# EAGLE board axios_combined (EAGLE 9.5.1), part 1 of 2
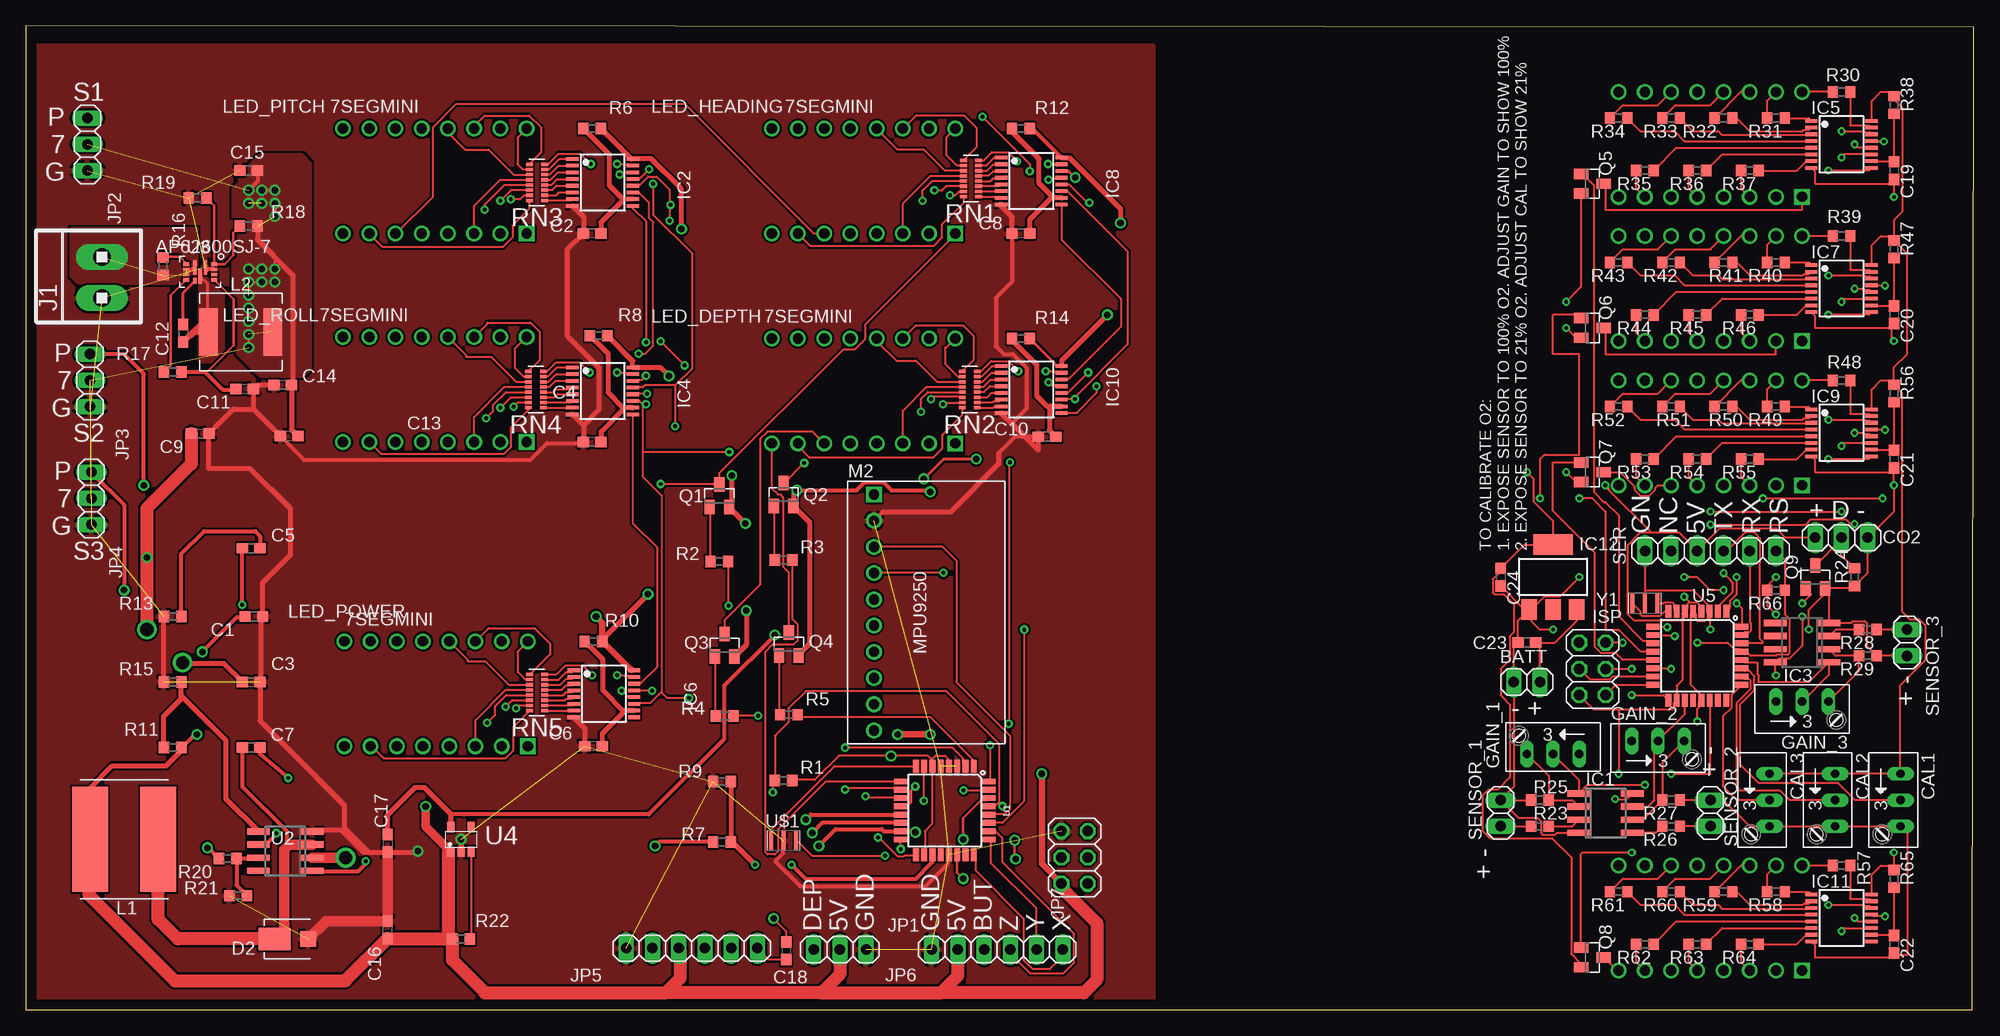
[diagram p0: board, top side]
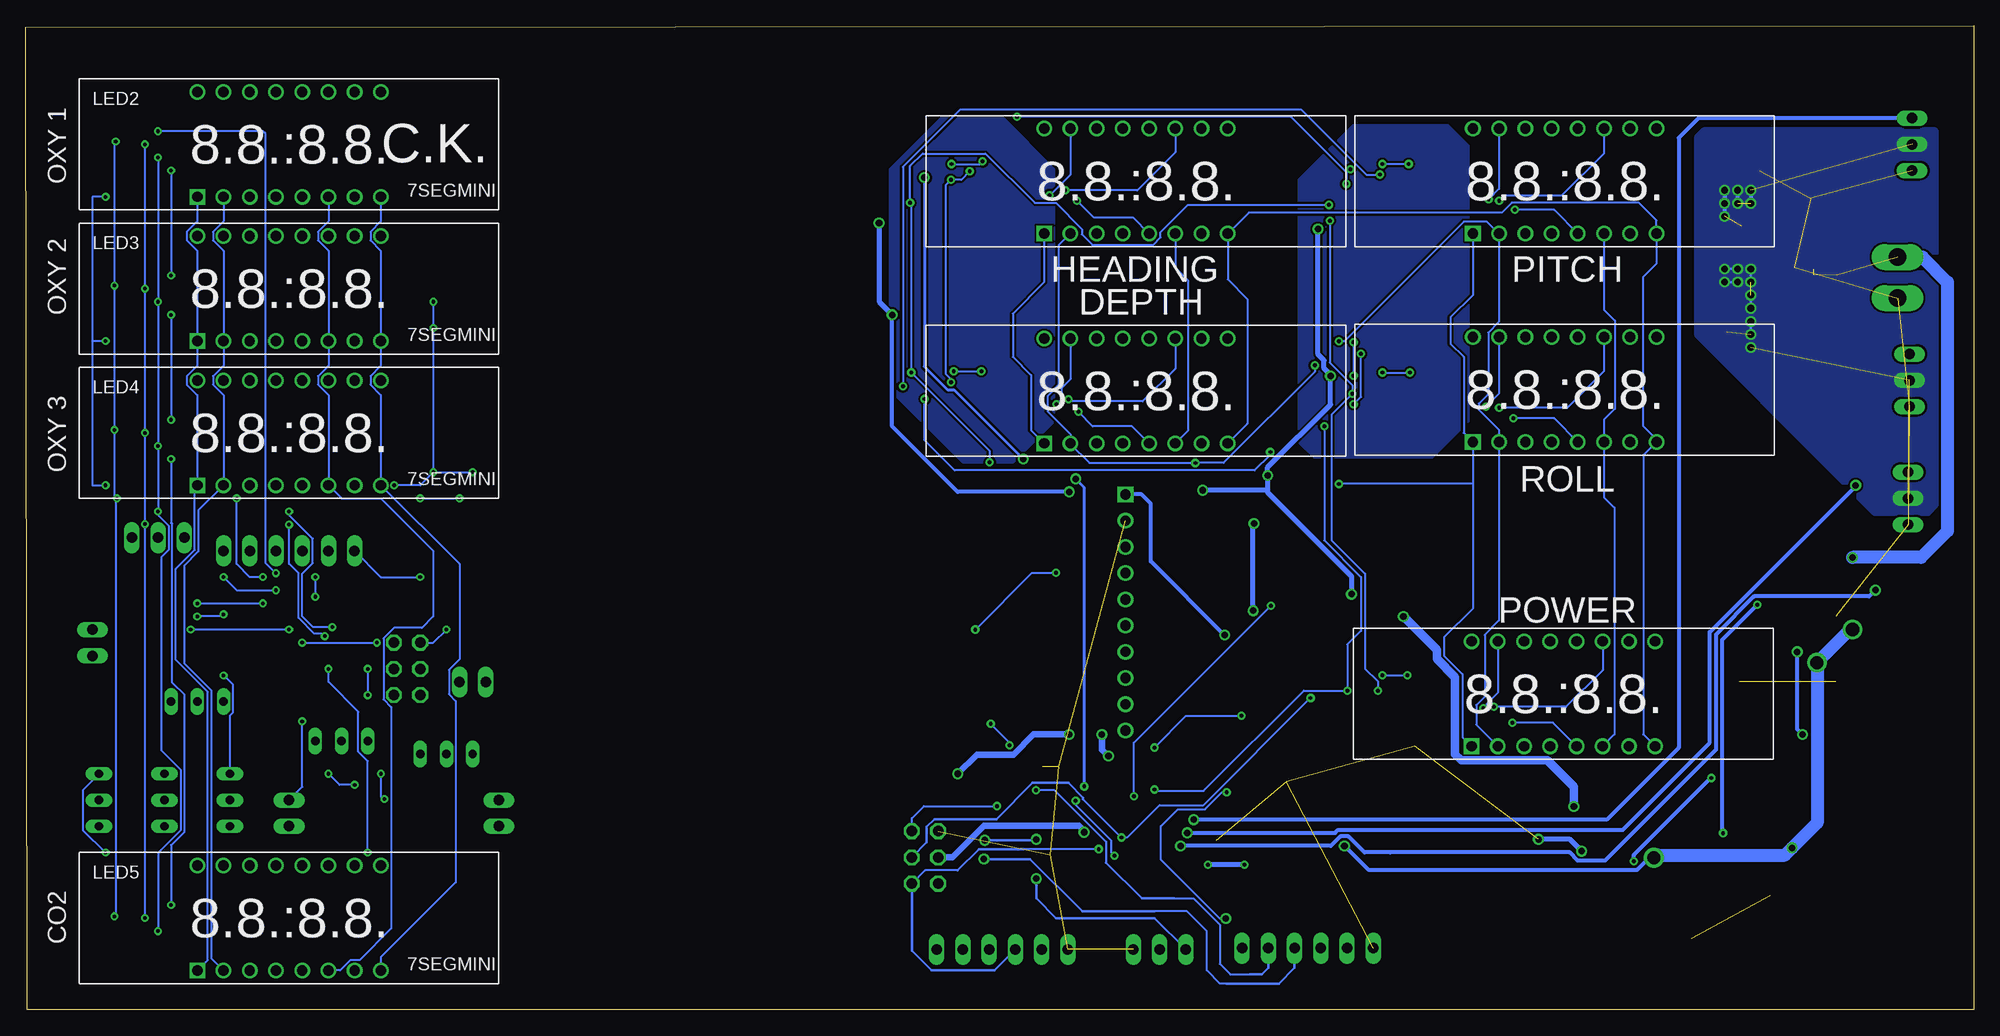
[diagram p1: board, bottom side, seen from below]

Size 188.7 x 95.3 mm. Coordinates in mm from the lower left corner, seen from the top.
Outline: 0,0 188.57,0 188.7,95.17 0,95.3 0,0
Copper layers (1*16): Top 0.035mm / dielectric 1.5mm / Bottom 0.035mm
Design rules "default": minimum track width 6mil, minimum drill 0.35mm, track to track 6mil, track to pad 6mil, pad to pad 6mil, via to via 6mil, smd to smd 6mil, copper to edge 40mil, drill to drill 6mil, minimum pad ring 10mil, minimum via ring 8mil, stop-mask expansion 4mil, vias tented up to drill 0mil, thermal gap 10mil
Net classes: 2 Low Power: width 0.254 mm, drill 0.635 mm, clearance 0.203 mm; 3 Analog: width 0.254 mm, drill 0.381 mm, clearance 0.203 mm; 4 Digital: width 0.203 mm, drill 0.381 mm, clearance 0.203 mm; 5 Medium Power: width 0.381 mm, drill 0.635 mm, clearance 0.203 mm

## Footprints (pad centres in the part's own frame; a part is rotated, then mirrored left to right if it is on the bottom)
1X02 = drill 1.016 long: 1 -1.27,0; 2 1.27,0
C0603 = smd 1.1 x 1: 1 -0.85,0; 2 0.85,0
RJ9W = drill 0.813 long: A 2.54,0.635; E -2.54,0.635; S 0,0.635
1X03 = drill 1.016 long: 1 -2.54,0; 2 0,0; 3 2.54,0
SMPA = smd 1.524 x 1.524: A 1.702,0 | smd 3.099 x 2.21: C -1.549,0
SO8 = smd 0.6 x 2.2: 1 -1.905,-2.6; 2 -0.635,-2.6; 3 0.635,-2.6; 4 1.905,-2.6; 5 1.905,2.6; 6 0.635,2.6; 7 -0.635,2.6; 8 -1.905,2.6
TSSOP16 = smd 0.35 x 1.2: 1 -2.275,-2.925; 2 -1.625,-2.925; 3 -0.975,-2.925; 4 -0.325,-2.925; 5 0.325,-2.925; 6 0.975,-2.925; 7 1.625,-2.925; 8 2.275,-2.925; 9 2.275,2.925; 10 1.625,2.925; 11 0.975,2.925; 12 0.325,2.925; 13 -0.325,2.925; 14 -0.975,2.925; 15 -1.625,2.925; 16 -2.275,2.925
SOT223 = smd 1.5 x 2: 1 -2.3,-3.15; 2 0,-3.15; 3 2.3,-3.15 | smd 3.8 x 2: 4 0,3.15
2X03 = drill 1.016 octagon: 1 -2.54,-1.27; 2 -2.54,1.27; 3 0,-1.27; 4 0,1.27; 5 2.54,-1.27; 6 2.54,1.27
1X2MTA = drill 1.676 long: 1 1.981,0; 2 -1.981,0
1X06 = drill 1.016 long: 1 -6.35,0; 2 -3.81,0; 3 -1.27,0; 4 1.27,0; 5 3.81,0; 6 6.35,0
SRN1060-330M = smd 3.5 x 10.2: P$1 -3.3,0; P$2 3.3,0
ECS-MPIL0630-R82MC = smd 1.8 x 4.6: P$1 -3.13,0; P$2 3.1,0
7SEGMINI = drill 1 square: 1 -8.89,-5.08 | drill 1: 2 -6.35,-5.08; 3 -3.81,-5.08; 4 -1.27,-5.08; 5 1.27,-5.08; 6 3.81,-5.08; 7 6.35,-5.08; 8 8.89,-5.08; 9 8.89,5.08; 10 6.35,5.08; 11 3.81,5.08; 12 1.27,5.08; 13 -1.27,5.08; 14 -3.81,5.08; 15 -6.35,5.08; 16 -8.89,5.08
MPU9250 = drill 1: AD0 0,-3.81; ECL 0,-1.27; EDA 0,1.27; FSYNC 0,-11.43; GND 0,8.89; INT 0,-6.35; NCS 0,-8.89; SCL 0,6.35; SDA 0,3.81 | drill 1 square: VCC 0,11.43
SOT23 = smd 1 x 1.4: 1 -0.95,-1.1; 2 0.95,-1.1; 3 0,1.1
R0603 = smd 1 x 1.1: 1 -0.85,0; 2 0.85,0
CAY16-681J8LF = smd 0.35 x 0.65: 1 -1.75,-0.725; 2 -1.25,-0.725; 3 -0.75,-0.725; 4 -0.25,-0.725; 5 0.25,-0.725; 6 0.75,-0.725; 7 1.25,-0.725; 8 1.75,-0.725; 9 1.75,0.725; 10 1.25,0.725; 11 0.75,0.725; 12 0.25,0.725; 13 -0.25,0.725; 14 -0.75,0.725; 15 -1.25,0.725; 16 -1.75,0.725
TQFP32-08 = smd 1.27 x 0.559: 1 -4.293,2.8; 2 -4.293,2; 3 -4.293,1.2; 4 -4.293,0.4; 5 -4.293,-0.4; 6 -4.293,-1.2; 7 -4.293,-2; 8 -4.293,-2.8; 17 4.293,-2.8; 18 4.293,-2; 19 4.293,-1.2; 20 4.293,-0.4; 21 4.293,0.4; 22 4.293,1.2; 23 4.293,2; 24 4.293,2.8 | smd 0.559 x 1.27: 9 -2.8,-4.293; 10 -2,-4.293; 11 -1.2,-4.293; 12 -0.4,-4.293; 13 0.4,-4.293; 14 1.2,-4.293; 15 2,-4.293; 16 2.8,-4.293; 25 2.8,4.293; 26 2,4.293; 27 1.2,4.293; 28 0.4,4.293; 29 -0.4,4.293; 30 -1.2,4.293; 31 -2,4.293; 32 -2.8,4.293
V-QFN2030-12 = smd 0.6 x 0.35: BST 0.85,-0.5 | smd 0.35 x 0.6: EN -0.75,-1.35; FB -0.75,1.35; FSEL 0.25,-1.35; GND -0.25,1.35; MODE -0.25,-1.35; PG 0.75,-1.35; SS/TR 0.25,1.35; VCC 0.75,1.35 | smd 1.4 x 0.35: PGND -0.45,0.5; SW 0.45,0; VIN -0.45,-0.5
TSOP-5 = smd 0.7 x 1: 1 -0.99,-1.2; 2 0,-1.2; 3 0.99,-1.2; 4 0.99,1.2; 5 -0.99,1.2
CSTCR6M = smd 0.4 x 1.9: 1 -1.2,0; 2 0,0; 3 1.2,0

## Placement (x,y rotation side)
BATT  BATT  [1X02]  145.41,31.75 0 top
C1  100u  [C0603]  22.1,38.1 0 top
C2  0.1u  [C0603]  54.86,75.18 180 top
C3  47u  [C0603]  21.84,31.75 0 top
C4  0.1u  [C0603]  54.86,54.99 180 top
C5  1.5n  [C0603]  21.84,44.7 0 top
C6  0.1u  [C0603]  54.99,25.53 180 top
C7  10n  [C0603]  21.84,25.4 180 top
C8  0.1u  [C0603]  96.39,75.18 180 top
C9  22u  [C0603]  16.89,55.82 0 top
C10  0.1u  [C0603]  98.93,55.5 180 top
C11  1u  [C0603]  21.21,60.13 0 top
C12  100n  [C0603]  15.24,65.53 270 top
C13  22u  [C0603]  25.53,55.56 180 top
C14  22u  [C0603]  24.89,60.51 180 top
C15  22u  [C0603]  21.59,81.28 180 top
C16  1.5u  [C0603]  35.05,7.75 90 top
C17  1.5u  [C0603]  35.05,16.13 270 top
C18  100n  [C0603]  73.66,5.71 270 top
C19  10n  [C0603]  180.97,81.28 270 top
C20  10n  [C0603]  180.97,67.31 270 top
C21  10n  [C0603]  180.97,53.34 270 top
C22  10n  [C0603]  180.97,6.35 270 top
C23  1u  [C0603]  145.41,35.56 180 top
C24  1u  [C0603]  142.88,41.91 270 top
CAL1  10k  [RJ9W]  180.97,20.32 270 top
CAL2  10k  [RJ9W]  174.62,20.32 270 top
CAL3  10k  [RJ9W]  168.27,20.32 270 top
CO2  CO2  [1X03]  175.89,45.72 180 top
D2  V4PAN50-M3  [SMPA]  25.65,6.86 0 top
GAIN_1  10k  [RJ9W]  147.95,25.4 180 top
GAIN_2  10k  [RJ9W]  158.11,25.4 0 top
GAIN_3  10k  [RJ9W]  172.08,29.21 0 top
IC1  AD712R  [SO8]  153.03,19.05 270 top
IC2  SN74HCS595QPWRQ1  [TSSOP16]  55.88,80.14 270 top
IC3  AD712R  [SO8]  172.08,35.56 90 top
IC4  SN74HCS595QPWRQ1  [TSSOP16]  55.88,59.94 270 top
IC5  SN74HCS595QPWRQ1  [TSSOP16]  175.89,83.82 270 top
IC6  SN74HCS595QPWRQ1  [TSSOP16]  56.01,30.61 270 top
IC7  SN74HCS595QPWRQ1  [TSSOP16]  175.89,69.85 270 top
IC8  SN74HCS595QPWRQ1  [TSSOP16]  97.41,80.26 270 top
IC9  SN74HCS595QPWRQ1  [TSSOP16]  175.89,55.88 270 top
IC10  SN74HCS595QPWRQ1  [TSSOP16]  97.41,60.07 270 top
IC11  SN74HCS595QPWRQ1  [TSSOP16]  175.89,8.89 270 top
IC12  5V  [SOT223]  147.95,41.91 0 top
ISP  ISP  [2X03]  151.76,33.02 90 top
J1  [1X2MTA]  7.37,70.92 90 top
JP1  Depth Sensor  [1X03]  78.87,5.84 180 top
JP2  Servo1  [1X03]  5.97,83.82 90 top
JP3  Servo2  [1X03]  6.22,60.96 90 top
JP4  Servo3  [1X03]  6.35,49.53 90 top
JP5  SER_CONNECT  [1X06]  64.52,5.97 0 top
JP6  CTRL_CONNECT  [1X06]  94.11,5.84 180 top
JP7  ISP  [2X03]  101.6,14.76 90 top
L1  33u  [SRN1060-330M]  9.52,16.51 180 top
L2  0.82u  [ECS-MPIL0630-R82MC]  20.83,65.66 0 top
LED2  7SEGMINI  [7SEGMINI]  163.19,83.82 0 bottom
LED3  7SEGMINI  [7SEGMINI]  163.19,69.85 0 bottom
LED4  7SEGMINI  [7SEGMINI]  163.19,55.88 0 bottom
LED5  7SEGMINI  [7SEGMINI]  163.19,8.89 0 bottom
LED_DEPTH  7SEGMINI  [7SEGMINI]  81.15,59.94 0 bottom
LED_HEADING  7SEGMINI  [7SEGMINI]  81.15,80.26 0 bottom
LED_PITCH  7SEGMINI  [7SEGMINI]  39.62,80.26 0 bottom
LED_POWER  7SEGMINI  [7SEGMINI]  39.75,30.61 0 bottom
LED_ROLL  7SEGMINI  [7SEGMINI]  39.62,60.07 0 bottom
M2  MPU9250  [MPU9250]  82.17,38.48 0 top
Q1  XP231P0201TR  [SOT23]  67.18,49.78 0 top
Q2  XP231P0201TR  [SOT23]  73.41,49.91 0 top
Q3  XP231P0201TR  [SOT23]  67.69,35.31 0 top
Q4  XP231P0201TR  [SOT23]  73.91,35.43 0 top
Q5  XP231P0201TR  [SOT23]  151.76,80.01 270 top
Q6  XP231P0201TR  [SOT23]  151.76,66.04 270 top
Q7  XP231P0201TR  [SOT23]  151.76,52.07 270 top
Q8  XP231P0201TR  [SOT23]  151.76,5.08 270 top
Q9  SST5485  [SOT23]  173.35,41.91 0 top
R1  10k  [R0603]  73.41,22.23 180 top
R2  1k  [R0603]  67.18,43.43 180 top
R3  1k  [R0603]  73.41,43.56 180 top
R4  1k  [R0603]  67.69,28.45 180 top
R5  1k  [R0603]  73.91,28.57 180 top
R6  10k  [R0603]  54.86,85.34 180 top
R7  15k  [R0603]  67.44,16.26 0 top
R8  10k  [R0603]  55.5,65.28 180 top
R9  10k  [R0603]  67.44,22.1 180 top
R10  10k  [R0603]  54.99,35.69 180 top
R11  52k  [R0603]  14.22,25.4 0 top
R12  10k  [R0603]  96.39,85.34 180 top
R13  12k  [R0603]  14.22,38.1 0 top
R14  10k  [R0603]  96.39,65.02 180 top
R15  10k  [R0603]  14.22,31.75 0 top
R16  100k  [R0603]  13.27,72.01 270 top
R17  100k  [R0603]  14.22,61.78 0 top
R18  100k  [R0603]  21.59,75.9 0 top
R19  100k  [R0603]  16.63,78.61 0 top
R20  15k  [R0603]  19.56,14.65 0 top
R21  10k  [R0603]  20.57,11.05 180 top
R22  100k  [R0603]  42.16,6.86 180 top
R23  100k  [R0603]  146.69,17.78 0 top
R24  10k  [R0603]  177.16,41.91 90 top
R25  0.7k  [R0603]  146.69,20.32 0 top
R26  100k  [R0603]  159.38,17.78 180 top
R27  0.7k  [R0603]  159.38,20.32 180 top
R28  100k  [R0603]  178.44,36.83 180 top
R29  0.7k  [R0603]  178.44,34.29 180 top
R30  [R0603]  175.89,88.9 180 top
R31  [R0603]  169.54,86.36 180 top
R32  [R0603]  164.46,86.36 180 top
R33  [R0603]  159.38,86.36 180 top
R34  [R0603]  154.3,86.36 180 top
R35  [R0603]  156.84,81.28 180 top
R36  [R0603]  161.92,81.28 180 top
R37  [R0603]  167,81.28 180 top
R38  100k  [R0603]  180.97,87.63 90 top
R39  [R0603]  175.89,74.93 180 top
R40  [R0603]  169.54,72.39 180 top
R41  [R0603]  164.46,72.39 180 top
R42  [R0603]  159.38,72.39 180 top
R43  [R0603]  154.3,72.39 180 top
R44  [R0603]  156.84,67.31 180 top
R45  [R0603]  161.92,67.31 180 top
R46  [R0603]  167,67.31 180 top
R47  100k  [R0603]  180.97,73.66 90 top
R48  [R0603]  175.89,60.96 180 top
R49  [R0603]  169.54,58.42 180 top
R50  [R0603]  164.46,58.42 180 top
R51  [R0603]  159.38,58.42 180 top
R52  [R0603]  154.3,58.42 180 top
R53  [R0603]  156.84,53.34 180 top
R54  [R0603]  161.92,53.34 180 top
R55  [R0603]  167,53.34 180 top
R56  100k  [R0603]  180.97,59.69 90 top
R57  [R0603]  175.89,13.97 180 top
R58  [R0603]  169.54,11.43 180 top
R59  [R0603]  164.46,11.43 180 top
R60  [R0603]  159.38,11.43 180 top
R61  [R0603]  154.3,11.43 180 top
R62  [R0603]  156.84,6.35 180 top
R63  [R0603]  161.92,6.35 180 top
R64  [R0603]  167,6.35 180 top
R65  100k  [R0603]  180.97,12.7 90 top
R66  10k  [R0603]  169.54,40.64 180 top
RN1  CAY16-681J8LF  [CAY16-681J8LF]  91.57,80.52 90 top
RN2  CAY16-681J8LF  [CAY16-681J8LF]  91.44,60.07 90 top
RN3  CAY16-681J8LF  [CAY16-681J8LF]  49.53,80.14 90 top
RN4  CAY16-681J8LF  [CAY16-681J8LF]  49.4,60.07 90 top
RN5  CAY16-681J8LF  [CAY16-681J8LF]  49.53,30.73 90 top
SENSOR_1  [1X02]  142.88,19.05 90 top
SENSOR_2  [1X02]  163.19,19.05 90 top
SENSOR_3  [1X02]  182.24,35.56 270 top
SER  SER  [1X06]  163.19,44.45 0 top
U1  ATMEGA328P_TQFP  [TQFP32-08]  89.03,19.3 270 top
U2  ACT4065ASH-T  [SO8]  25.15,15.37 90 top
U3  AP62600SJ-7  [V-QFN2030-12]  16.89,71.46 270 top
U4  NCP164CSN330T1G  [TSOP-5]  42.16,16.51 0 top
U5  ATMEGA328P_TQFP  [TQFP32-08]  161.92,34.29 270 top
U$1  CSTNE16M0V530000R0  [CSTCR6M]  73.41,16.38 0 top
Y1  16MHz  [CSTCR6M]  156.84,39.37 180 top

## Library data of the parts
BATT CO2 ISP JP1-JP7 SENSOR_1-SENSOR_3 SER = pinhead
C1-C24 = rcl; SPICEPREFIX: C
CAL1-CAL3 GAIN_1-GAIN_3 = pot
D2 IC2 IC4-IC11 L1 L2 LED2-LED5 LED_DEPTH LED_HEADING LED_PITCH LED_POWER LED_ROLL Q1-Q9 RN1-RN5 U2-U4 U$1 Y1 = axios_components
IC1 IC3 = analog-devices; MF: ALTERA CORPORATION; MPN: AD712KRZ; OC_FARNELL: 1263975; OC_NEWARK: 59K4556
IC12 = v-reg
J1 = con-amp
M2 = diy-modules
R1-R66 = rcl; SPICEPREFIX: R
U1 U5 = axios_components; PROD_ID: IC-09069

## Nets
+3V3 [Low Power]: C17.1 M2.VCC U4.5
+5V [Low Power]: C1.1 C16.1 IC2.16 IC4.16 IC6.16 IC8.16 IC10.16 JP1.2 JP5.3 JP6.5 JP7.2 L1.P$2 Q1.2 Q2.2 Q3.2 Q4.2 R1.1 R6.1 R8.1 R10.1 R11.2 R12.1 R14.1 R22.2 U1.4 U1.6 U1.18 U4.1
+7V [Low Power]: C13.1 C14.1 C15.1 JP2.2 JP3.2 JP4.2 L2.P$2 R18.2
+12V [Low Power]: C3.1 C9.1 J1.1 R7.1 R16.2 R20.1 U2.2 U3.FSEL U3.MODE U3.VIN
BATT: BATT.2 C23.1 IC12.3
BATT_LEVEL [Digital]: R7.2 R9.1 U1.19
BUTTON: JP6.4 JP7.1 U1.16
CAL1: CAL1.S U5.27
CAL2: CAL2.S U5.26
CAL3: CAL3.S U5.25
CARRY1: IC5.9 IC7.14
CARRY2: IC7.9 IC9.14
CARRY3: IC9.9 IC11.14
CO2: Q9.1 U5.32
CO2_PWM: CO2.2 Q9.3 R24.2
COM_D1: LED2.1 LED3.1 LED4.1 LED5.1 Q5.3
COM_D2: LED2.2 LED3.2 LED4.2 LED5.2 Q6.3
COM_D3: LED2.6 LED3.6 LED4.6 LED5.6 Q7.3
COM_D4: LED2.8 LED3.8 LED4.8 LED5.8 Q8.3
DEPTH [Analog]: JP1.3 U1.22
DIG1: Q5.1 U5.11
DIG2: Q6.1 U5.12
DIG3: Q7.1 U5.13
DIG4: Q8.1 U5.14
DIGIT_1 [Digital]: R2.1 U1.11
DIGIT_2 [Digital]: R3.1 U1.9
DIGIT_3 [Digital]: R4.1 U1.2
DIGIT_4 [Digital]: R5.1 U1.1
DISP_CLK: IC5.11 IC7.11 IC9.11 IC11.11 U5.9
DISP_DATA [Digital]: IC8.14 U1.12
DISP_DATA1: IC5.14 U5.2
EN7V: R16.1 U3.EN
GND [Medium Power]: C1.2 C2.2 C3.2 C4.2 C6.2 C8.2 C9.2 C10.2 C11.2 C13.2 C14.2 C15.2 C16.2 C17.2 D2.A IC2.8 IC4.8 IC6.8 IC8.8 IC10.8 J1.2 JP1.1 JP2.1 JP3.1 JP4.1 JP5.1 JP6.6 JP7.6 M2.GND R9.2 R13.1 R15.1 R19.1 R21.2 U1.3 U1.5 U1.21 U2.4 U3.GND U3.PGND U4.2 U$1.2
GND1: R17.1 U3.PG
GND2: BATT.1 C19.2 C20.2 C21.2 C22.2 C23.2 C24.2 CAL1.A CAL2.A CAL3.A CO2.1 IC1.4 IC3.4 IC5.8 IC7.8 IC9.8 IC11.8 IC12.1 ISP.6 Q9.2 R24.1 R25.1 R27.1 R29.1 SENSOR_1.2 SENSOR_2.2 SENSOR_3.2 SER.1 U5.3 U5.5 U5.21 Y1.2
MISO: ISP.1 U5.16
MOSI: ISP.4 U5.15
N$1 [Digital]: C18.2 JP5.6
N$2: IC1.3 R23.2
N$3: GAIN_1.A IC1.2 R25.2
N$4: GAIN_3.A IC3.2 R29.2
N$5: IC8.9 IC10.14
N$6: IC5.15 R30.1
N$7: U1.8 U$1.1
N$8: IC1.5 R26.2
N$9: GAIN_2.A IC1.6 R27.2
N$10: IC5.1 R31.1
N$11: IC3.3 R28.2
N$12: U1.7 U$1.3
N$13: IC5.4 R34.1
N$14: IC5.5 R35.1
N$15: IC5.6 R36.1
N$16: IC5.7 R37.1
N$17: C7.1 U2.1
N$18: LED2.13 R33.2
N$19: LED2.5 R36.2
N$20: LED2.3 R37.2
N$21: Q1.1 R2.2
N$22: IC7.15 R39.1
N$23: Q2.1 R3.2
N$24: Q3.1 R4.2
N$25: Q4.1 R5.2
N$26: IC7.1 R40.1
N$27: C7.2 D2.C L1.P$1 U2.3
N$28: IC7.2 R41.1
N$29: R11.1 R15.2 U2.5
N$30: R22.1 U4.3
N$31: C5.2 R13.2
N$32: IC5.2 R32.1
N$33: IC5.3 R33.1
N$34: R20.2 R21.1 U2.7
N$35: C5.1 U2.6
N$36: C11.1 R17.2 U3.VCC
N$37: C12.2 L2.P$1 U3.SW
N$38: C19.1 IC5.10 R38.1
N$39: LED2.16 R30.2
N$40: LED2.15 R31.2
N$41: LED2.14 R32.2
N$42: R18.1 R19.2 U3.FB
N$43: LED2.11 R34.2
N$44: LED2.7 R35.2
N$45: LED_PITCH.14 RN3.9
N$46: LED_PITCH.16 RN3.10
N$47: LED_PITCH.13 RN3.11
N$48: LED_PITCH.3 RN3.12
N$49: LED_PITCH.5 RN3.13
N$50: LED_PITCH.11 RN3.14
N$51: LED_PITCH.15 RN3.15
N$52: LED_PITCH.7 RN3.16
N$53: IC2.15 RN3.8
N$54: IC2.1 RN3.7
N$55: IC2.2 RN3.6
N$56: IC2.3 RN3.5
N$57: IC2.4 RN3.4
N$58: IC2.5 RN3.3
N$59: IC2.6 RN3.2
N$60: IC2.7 RN3.1
N$61: C2.1 IC2.10 R6.2
N$62: C12.1 U3.BST
N$63: IC7.3 R42.1
N$64: IC7.4 R43.1
N$65: IC2.14 IC10.9
N$66: IC7.5 R44.1
N$67: IC7.6 R45.1
N$68: IC7.7 R46.1
N$69: C20.1 IC7.10 R47.1
N$70: LED3.16 R39.2
N$71: LED3.15 R40.2
N$72: LED3.14 R41.2
N$73: LED3.13 R42.2
N$74: LED3.11 R43.2
N$75: LED3.7 R44.2
N$76: LED3.5 R45.2
N$77: LED3.3 R46.2
N$78: IC9.15 R48.1
N$79: IC9.1 R49.1
N$80: IC9.2 R50.1
N$81: IC9.3 R51.1
N$82: IC9.4 R52.1
N$83: IC9.5 R53.1
N$84: IC9.6 R54.1
N$85: IC9.7 R55.1
N$86: C21.1 IC9.10 R56.1
N$87: LED4.16 R48.2
N$88: LED4.15 R49.2
N$89: LED4.14 R50.2
N$90: LED4.13 R51.2
N$91: LED4.11 R52.2
N$92: LED4.7 R53.2
N$93: LED4.5 R54.2
N$94: LED4.3 R55.2
N$95: LED_ROLL.14 RN4.9
N$96: LED_ROLL.16 RN4.10
N$97: LED_ROLL.13 RN4.11
N$98: LED_ROLL.3 RN4.12
N$99: LED_ROLL.5 RN4.13
N$100: LED_ROLL.11 RN4.14
N$101: LED_ROLL.15 RN4.15
N$102: LED_ROLL.7 RN4.16
N$103: IC4.15 RN4.8
N$104: IC4.1 RN4.7
N$105: IC4.2 RN4.6
N$106: IC4.3 RN4.5
N$107: IC4.4 RN4.4
N$108: IC4.5 RN4.3
N$109: IC4.6 RN4.2
N$110: IC4.7 RN4.1
N$111: C4.1 IC4.10 R8.2
N$112: IC11.15 R57.1
N$113: IC11.1 R58.1
N$114: IC11.2 R59.1
N$115: IC2.9 IC4.14
N$116: IC11.3 R60.1
N$117: IC11.4 R61.1
N$118: IC11.5 R62.1
N$119: IC11.6 R63.1
N$120: IC11.7 R64.1
N$121: C22.1 IC11.10 R65.1
N$122: LED5.16 R57.2
N$123: LED5.15 R58.2
N$124: LED5.14 R59.2
N$125: LED5.13 R60.2
N$126: LED5.11 R61.2
N$127: LED5.7 R62.2
N$128: LED5.5 R63.2
N$129: LED5.3 R64.2
N$130: U5.7 Y1.1
N$131: U5.8 Y1.3
N$145: LED_POWER.14 RN5.9
N$146: LED_POWER.16 RN5.10
N$147: LED_POWER.13 RN5.11
N$148: LED_POWER.3 RN5.12
N$149: LED_POWER.5 RN5.13
N$150: LED_POWER.11 RN5.14
N$151: LED_POWER.15 RN5.15
N$152: LED_POWER.7 RN5.16
N$153: IC6.15 RN5.8
N$154: IC6.1 RN5.7
N$155: IC6.2 RN5.6
N$156: IC6.3 RN5.5
N$157: IC6.4 RN5.4
N$158: IC6.5 RN5.3
N$159: IC6.6 RN5.2
N$160: IC6.7 RN5.1
N$161: C6.1 IC6.10 R10.2
N$165: IC4.9 IC6.14
N$195: LED_HEADING.14 RN1.9
N$196: LED_HEADING.16 RN1.10
N$197: LED_HEADING.13 RN1.11
N$198: LED_HEADING.3 RN1.12
N$199: LED_HEADING.5 RN1.13
N$200: LED_HEADING.11 RN1.14
N$201: LED_HEADING.15 RN1.15
N$202: LED_HEADING.7 RN1.16
N$203: IC8.15 RN1.8
N$204: IC8.1 RN1.7
N$205: IC8.2 RN1.6
N$206: IC8.3 RN1.5
N$207: IC8.4 RN1.4
N$208: IC8.5 RN1.3
N$209: IC8.6 RN1.2
N$210: IC8.7 RN1.1
N$211: C8.1 IC8.10 R12.2
N$241: LED_DEPTH.1 LED_HEADING.1 LED_PITCH.1 LED_POWER.1 LED_ROLL.1 Q1.3
N$242: LED_DEPTH.2 LED_HEADING.2 LED_PITCH.2 LED_POWER.2 LED_ROLL.2 Q2.3
N$243: LED_DEPTH.6 LED_HEADING.6 LED_PITCH.6 LED_POWER.6 LED_ROLL.6 Q3.3
N$244: LED_DEPTH.8 LED_HEADING.8 LED_PITCH.8 LED_POWER.8 LED_ROLL.8 Q4.3
N$245: LED_DEPTH.14 RN2.9
N$246: LED_DEPTH.16 RN2.10
N$247: LED_DEPTH.13 RN2.11
N$248: LED_DEPTH.3 RN2.12
N$249: LED_DEPTH.5 RN2.13
N$250: LED_DEPTH.11 RN2.14
N$251: LED_DEPTH.15 RN2.15
N$252: LED_DEPTH.7 RN2.16
N$253: IC10.15 RN2.8
N$254: IC10.1 RN2.7
N$255: IC10.2 RN2.6
N$256: IC10.3 RN2.5
N$257: IC10.4 RN2.4
N$258: IC10.5 RN2.3
N$259: IC10.6 RN2.2
N$260: IC10.7 RN2.1
N$261: C10.1 IC10.10 R14.2
O2SENS_1: R23.1 SENSOR_1.1
O2SENS_2: R26.1 SENSOR_2.1
O2SENS_3: R28.1 SENSOR_3.1
OE [Digital]: IC2.13 IC4.13 IC6.13 IC8.13 IC10.13 U1.10
OE1: IC5.13 IC7.13 IC9.13 IC11.13 U5.1
OXY1: GAIN_1.S IC1.1 U5.22
OXY2: GAIN_2.S IC1.7 U5.19
OXY3: GAIN_3.S IC3.1 U5.28
RCK [Digital]: IC2.12 IC4.12 IC6.12 IC8.12 IC10.12 U1.32
REG_CLK: IC5.12 IC7.12 IC9.12 IC11.12 U5.10
RESET [Digital]: C18.1 JP7.5 R1.2 U1.29
RESET1: ISP.5 R66.1 SER.6 U5.29
RX: JP5.4 U1.30
RX1: SER.4 U5.30
SCK [Digital]: IC2.11 IC4.11 IC6.11 IC8.11 IC10.11 JP7.3 U1.17
SCK1: ISP.3 U5.17
SCL [Digital]: M2.SCL U1.28
SDA [Digital]: M2.SDA U1.27
SERVO_1 [Medium Power]: JP2.3 U1.13
SERVO_2 [Medium Power]: JP3.3 U1.14
SERVO_3 [Medium Power]: JP4.3 JP7.4 U1.15
TX: JP5.5 U1.31
TX1: SER.5 U5.31
VCC: C24.1 CAL1.E CAL2.E CAL3.E CO2.3 IC1.8 IC3.8 IC5.16 IC7.16 IC9.16 IC11.16 IC12.4 ISP.2 Q5.2 Q6.2 Q7.2 Q8.2 R38.2 R47.2 R56.2 R65.2 R66.2 SER.3 U5.4 U5.6 U5.18
X_AXIS [Digital]: JP6.1 U1.24
Y_AXIS [Digital]: JP6.2 U1.25
Z_AXIS [Digital]: JP6.3 U1.26